# Altium PCB lab2_kapustin_buck.PcbDoc
Units mm, origin at the board's own origin, x right, y up, seen from the top; angles counter-clockwise.
Board outline 16 x 30 mm, 6 copper layers (Top Layer, Signal Layer 1, Signal Layer 2, Signal Layer 3, Signal Layer 4, Bottom Layer), stack 1.503 mm thick; 38 components, 21 nets, 105 pads, 94 vias.
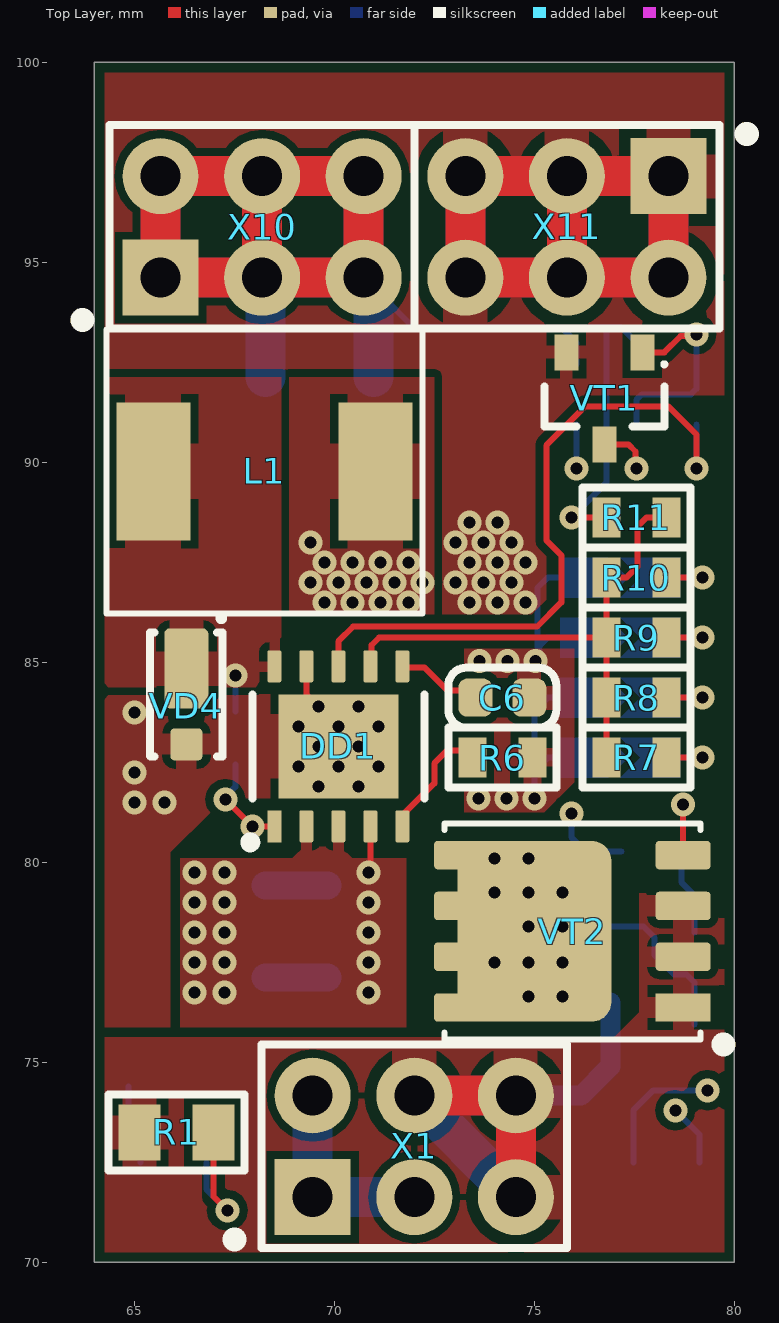
[diagram p0: Top Layer view]
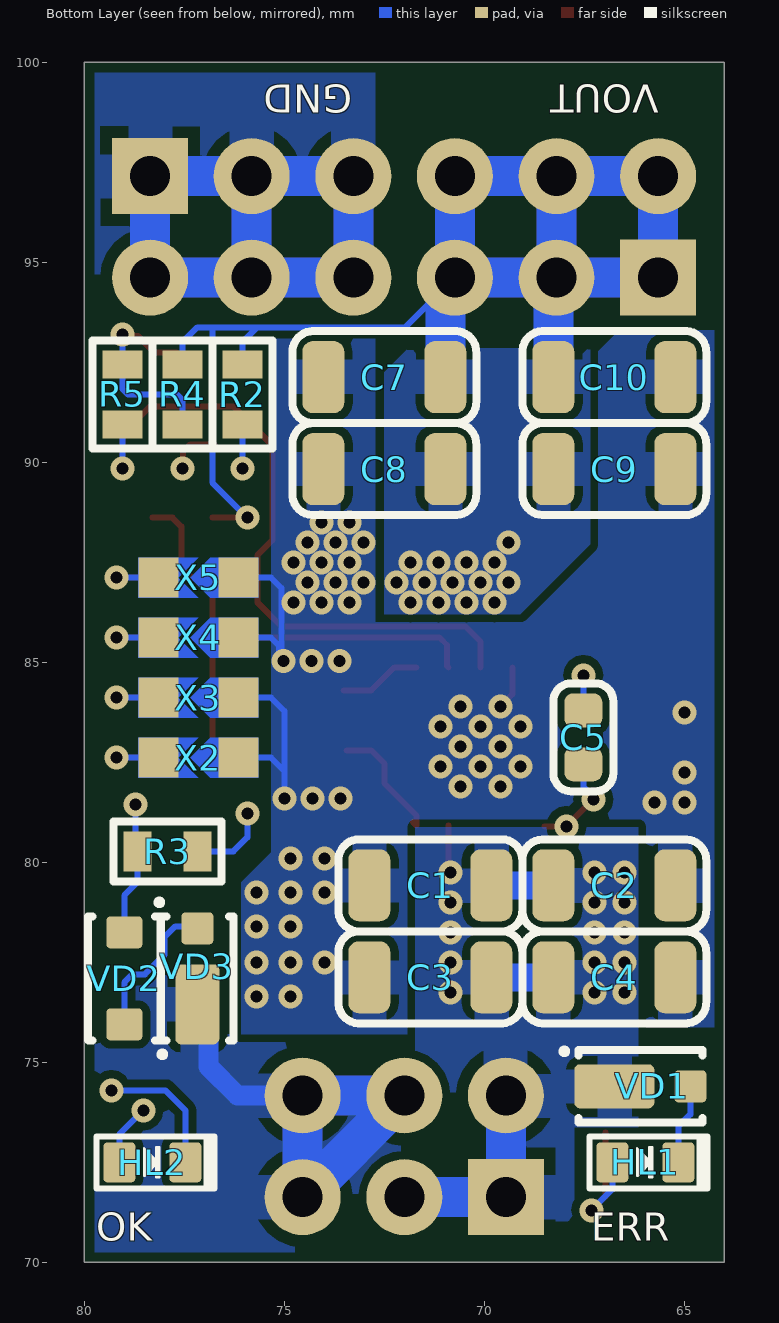
[diagram p1: Bottom Layer view, seen from below]
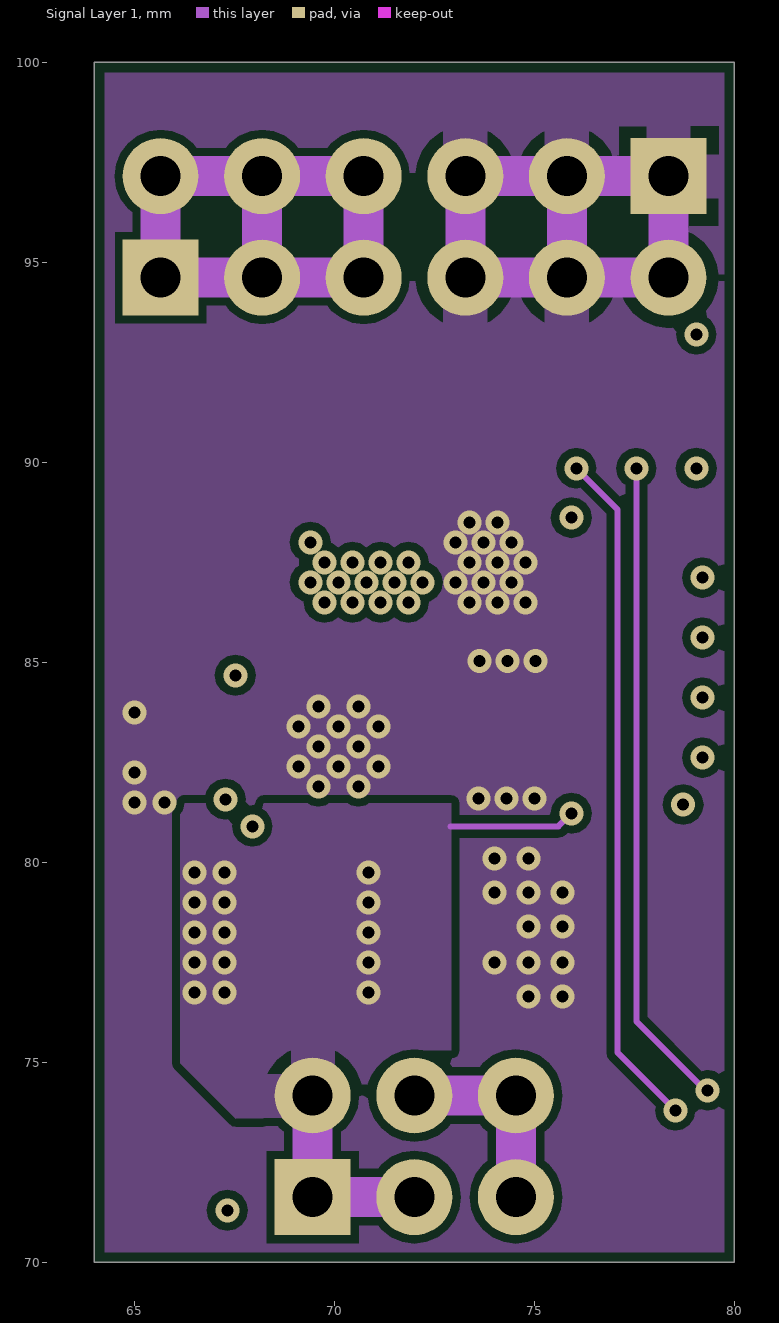
[diagram p2: Signal Layer 1]
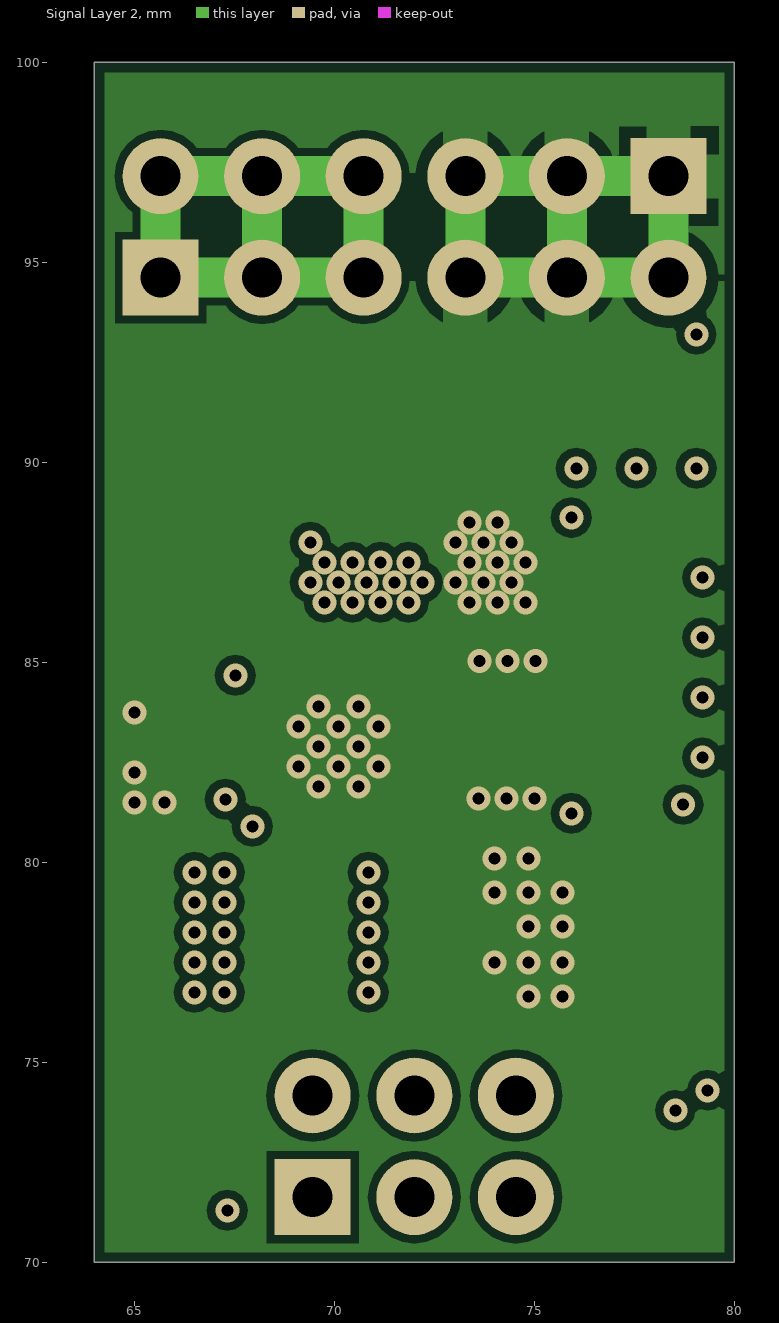
[diagram p3: Signal Layer 2]

## Layer stack, top to bottom
Top Solder: solder mask 0.0102, Solder Resist, Dk 3.5
Top Layer: signal copper 0.018
Prepreg 1: prepreg 0.125, FR4 HiTg170, Dk 5.07
Signal Layer 1: signal copper 0.018
Core 1: core 0.51, FR4, Dk 4.6
Signal Layer 2: signal copper 0.018
Prepreg 2: prepreg 0.125, FR4 HiTg170, Dk 5.07
Signal Layer 3: signal copper 0.018
Core 2: core 0.51, FR4, Dk 4.6
Signal Layer 4: signal copper 0.018
Prepreg 3: prepreg 0.125, FR4 HiTg170, Dk 5.07
Bottom Layer: signal copper 0.018
Bottom Solder: solder mask 0.0102, Solder Resist, Dk 3.5

## Board outline
64,70 64,100 80,100 80,72 80,70

## Design rules (kind name [scope] priority, off if disabled: settings)
AcuteAngle min_acute_angle [OnCopper] p1: minimum=3.50000000000000E+0001 checktracksonly=FALSE // Минимальный угол между примитивами топологии
BoardOutlineClearance board_outline_clearance_std [NOT (OnLayer('Bottom Overlay') OR OnLayer('Top Overlay'))] p1: gap=0.25 ignorepadtopadclearanceinfootprint=FALSE except(0: Arc-SplitContinuation Track-SplitContinuation SMDPad-SplitContinuation THPad-SplitContinuation Via-SplitContinuation Fill-SplitContinuation Poly-SplitContinuation Region-SplitContinuation Text-SplitContinuation) // Отступ элементов топологии от края фрезеруемой печатной платы
Clearance clearance_outer_18um_std [OnTopLayer OR OnBottomLayer] p1: gap=0.125 ignorepadtopadclearanceinfootprint=TRUE except(0.2: Arc-Fill Arc-Poly Track-Fill Track-Poly SMDPad-SMDPad SMDPad-Fill SMDPad-Poly THPad-Fill THPad-Poly Via-Fill Via-Poly Fill-Fill Fill-Poly Poly-Poly Poly-Region Poly-Text; 0.25: Arc-Hole Track-Hole SMDPad-Hole THPad-Hole Via-Hole Fill-Hole Poly-Hole Region-Hole Text-Hole) // Зазоры на внешних слоях
Clearance clearance_inner_18um_std [NOT (OnTopLayer Or OnBottomLayer)] p2: gap=0.125 ignorepadtopadclearanceinfootprint=FALSE except(0.2: Arc-Fill Arc-Poly Track-Fill Track-Poly SMDPad-SMDPad SMDPad-Fill SMDPad-Poly THPad-Fill THPad-Poly Via-Fill Via-Poly Fill-Fill Fill-Poly Poly-Poly Poly-Region Poly-Text; 0.25: Arc-Hole Track-Hole SMDPad-Hole THPad-Hole Via-Hole Fill-Hole Poly-Hole Region-Hole Text-Hole) // Зазоры на внутренних слоях
ComponentClearance [All] p1: gap=0 collisioncheckmode=3 verticalgap=0 showdistances=FALSE
DiffPairsRouting diff_pairs_routing [All] p1: maxlimit=0.254 minlimit=0.127 mostfreqgap=0.254 toplayer_maxgap=0.127 toplayer_prefgap=0.127 toplayer_minwidth=0.143 toplayer_maxwidth=0.143 toplayer_prefwidth=0.143 midlayer1_minwidth=0.381 midlayer1_maxwidth=0.381 midlayer1_prefwidth=0.381 midlayer2_minwidth=0.381 midlayer2_maxwidth=0.381 midlayer2_prefwidth=0.381 midlayer3_minwidth=0.381 midlayer3_maxwidth=0.381 midlayer3_prefwidth=0.381 midlayer4_minwidth=0.381 midlayer4_maxwidth=0.381 midlayer4_prefwidth=0.381 bottomlayer_maxgap=0.127 bottomlayer_prefgap=0.127 bottomlayer_minwidth=0.143 bottomlayer_maxwidth=0.143 bottomlayer_prefwidth=0.143 impedanceprofiledriven=TRUE impedanceprofileid={FD46899E-B5A2-4EF5-A302-5D2DB6A51F35} maxuncoupledlength=12.7 // Правила трассировки дифференциальных пар
HoleSize min_hole_size_std [IsPad] p1: absolutevalues=TRUE maxlimit=5.9 minlimit=0.6 maxpercent=80.000 minpercent=20.000 // Диаметр межслойного переходного отверстия
HoleSize min_hole_size_via_std [IsVia] p2: absolutevalues=TRUE maxlimit=5.9 minlimit=0.3 maxpercent=80.000 minpercent=20.000 // Минимальный диаметр монтажного отверстия
HoleToHoleClearance hole_to_hole_clearance_std [All] p1: gap=0.2 allowstackedmicrovias=FALSE // Минимальное расстояние между краями двух отверстий
MinimumAnnularRing min_via_ar_std [All] p1: minimumring=0.15 // Поясок площадки переходного отверстия (Annular ring VIA)
MinimumAnnularRing min_pad_ar_std [All] p2: minimumring=0.2 // Поясок монтажной контактной площадки (Annular ring PAD)
MinimumSolderMaskSliver min_solder_mask_bridge_std [All] p1: minsoldermaskwidth=0.15 // Мнимальная ширина масочного мостика
PlaneClearance plane_clearance_18um_std [All] p1: clearance=0.2 // Отступ полигона (для слоя plane) от элементов топологии
PlaneConnect [All] p1: planeconnectstyle=Relief reliefexpansion=0.5 reliefentries=4 reliefconductorwidth=0.2 reliefairgap=0.2
PolygonConnect poly_connect_to_pad<=0.3 [(AsMM(PadXSize_AllLayers)<=0.301) or (AsMM(PadYSize_AllLayers)<=0.301)] p1: thpad.connectstyle=Relief thpad.reliefconductorwidth=0.2 thpad.reliefentries=4 thpad.polygonreliefangle="90 Angle" thpad.airgapwidth=0.2 smdpad.connectstyle=Relief smdpad.reliefconductorwidth=0.2 smdpad.reliefentries=4 smdpad.polygonreliefangle="90 Angle" smdpad.airgapwidth=0.2 via.connectstyle=Direct via.reliefconductorwidth=0.254 via.reliefentries=4 via.polygonreliefangle="90 Angle" via.airgapwidth=0.254 // Правила подключения полигонов для падов от 0,3мм и меньше
PolygonConnect poly_connect_to_pad<=0.4 [(AsMM(PadXSize_AllLayers)<=0.401) or (AsMM(PadYSize_AllLayers)<=0.401)] p2: thpad.connectstyle=Relief thpad.reliefconductorwidth=0.26 thpad.reliefentries=4 thpad.polygonreliefangle="90 Angle" thpad.airgapwidth=0.2 smdpad.connectstyle=Relief smdpad.reliefconductorwidth=0.26 smdpad.reliefentries=4 smdpad.polygonreliefangle="90 Angle" smdpad.airgapwidth=0.2 via.connectstyle=Direct via.reliefconductorwidth=0.254 via.reliefentries=4 via.polygonreliefangle="90 Angle" via.airgapwidth=0.254 // Правила подключения полигонов для падов от 0,4 и меньше
PolygonConnect poly_connect_to_pad<=0.6 [(AsMM(PadXSize_AllLayers)<=0.601) or (AsMM(PadYSize_AllLayers)<=0.601)] p3: thpad.connectstyle=Relief thpad.reliefconductorwidth=0.33 thpad.reliefentries=4 thpad.polygonreliefangle="90 Angle" thpad.airgapwidth=0.2 smdpad.connectstyle=Relief smdpad.reliefconductorwidth=0.33 smdpad.reliefentries=4 smdpad.polygonreliefangle="90 Angle" smdpad.airgapwidth=0.2 via.connectstyle=Direct via.reliefconductorwidth=0.254 via.reliefentries=4 via.polygonreliefangle="90 Angle" via.airgapwidth=0.254 // Правила подключения полигонов для падов от 0,6мм и меньше
PolygonConnect poly_connect_to_pad<=0.7 [(AsMM(PadXSize_AllLayers)<=0.701) or (AsMM(PadYSize_AllLayers)<=0.701)] p4: thpad.connectstyle=Relief thpad.reliefconductorwidth=0.46 thpad.reliefentries=4 thpad.polygonreliefangle="90 Angle" thpad.airgapwidth=0.2 smdpad.connectstyle=Relief smdpad.reliefconductorwidth=0.46 smdpad.reliefentries=4 smdpad.polygonreliefangle="90 Angle" smdpad.airgapwidth=0.2 via.connectstyle=Direct via.reliefconductorwidth=0.254 via.reliefentries=4 via.polygonreliefangle="90 Angle" via.airgapwidth=0.254 // Правила подключения полигонов для падов от 0,7мм и меньше
PolygonConnect poly_connect_to_pad<=0.8 [(AsMM(PadXSize_AllLayers)<=0.8)or(AsMM(PadYSize_AllLayers)<=0.8)] p5: thpad.connectstyle=Relief thpad.reliefconductorwidth=0.53 thpad.reliefentries=4 thpad.polygonreliefangle="90 Angle" thpad.airgapwidth=0.3 smdpad.connectstyle=Relief smdpad.reliefconductorwidth=0.53 smdpad.reliefentries=4 smdpad.polygonreliefangle="90 Angle" smdpad.airgapwidth=0.2 via.connectstyle=Direct via.reliefconductorwidth=0.254 via.reliefentries=4 via.polygonreliefangle="90 Angle" via.airgapwidth=0.254 // Правила подключения полигонов для падов от 0,8мм и меньше
PolygonConnect poly_connect_to_pad<=1 [(AsMM(PadXSize_AllLayers)<=1.01)or(AsMM(PadYSize_AllLayers)<=1.01)] p6: thpad.connectstyle=Relief thpad.reliefconductorwidth=0.6 thpad.reliefentries=4 thpad.polygonreliefangle="90 Angle" thpad.airgapwidth=0.3 smdpad.connectstyle=Relief smdpad.reliefconductorwidth=0.6 smdpad.reliefentries=4 smdpad.polygonreliefangle="90 Angle" smdpad.airgapwidth=0.2 via.connectstyle=Direct via.reliefconductorwidth=0.254 via.reliefentries=4 via.polygonreliefangle="90 Angle" via.airgapwidth=0.254 // Правила подключения полигонов для падов от 1мм и меньше
PolygonConnect poly_connect_to_pad<=1.3 [(AsMM(PadXSize_AllLayers)<=1.31)or(AsMM(PadYSize_AllLayers)<=1.31)] p7: thpad.connectstyle=Relief thpad.reliefconductorwidth=0.66 thpad.reliefentries=4 thpad.polygonreliefangle="90 Angle" thpad.airgapwidth=0.3 smdpad.connectstyle=Relief smdpad.reliefconductorwidth=0.86 smdpad.reliefentries=4 smdpad.polygonreliefangle="90 Angle" smdpad.airgapwidth=0.2 via.connectstyle=Direct via.reliefconductorwidth=0.254 via.reliefentries=4 via.polygonreliefangle="90 Angle" via.airgapwidth=0.254 // Правила подключения полигонов для падов от 1,3мм и меньше
PolygonConnect poly_connect_to_pad<=1.6 [(AsMM(PadXSize_AllLayers)<=1.61)or(AsMM(PadYSize_AllLayers)<=1.61)] p8: thpad.connectstyle=Relief thpad.reliefconductorwidth=0.8 thpad.reliefentries=4 thpad.polygonreliefangle="90 Angle" thpad.airgapwidth=0.3 smdpad.connectstyle=Relief smdpad.reliefconductorwidth=1 smdpad.reliefentries=4 smdpad.polygonreliefangle="90 Angle" smdpad.airgapwidth=0.2 via.connectstyle=Direct via.reliefconductorwidth=0.254 via.reliefentries=4 via.polygonreliefangle="90 Angle" via.airgapwidth=0.254 // Правила подключения полигонов для падов от 1,6мм и меньше
PolygonConnect poly_connect_to_pad<=1.8 [(AsMM(PadXSize_AllLayers)<=1.8)or(AsMM(PadYSize_AllLayers)<=1.8)] p9: thpad.connectstyle=Relief thpad.reliefconductorwidth=1 thpad.reliefentries=4 thpad.polygonreliefangle="90 Angle" thpad.airgapwidth=0.3 smdpad.connectstyle=Relief smdpad.reliefconductorwidth=1.2 smdpad.reliefentries=4 smdpad.polygonreliefangle="90 Angle" smdpad.airgapwidth=0.2 via.connectstyle=Direct via.reliefconductorwidth=0.254 via.reliefentries=4 via.polygonreliefangle="90 Angle" via.airgapwidth=0.254 // Правила подключения полигонов для падов от 1,8мм и меньше
PolygonConnect poly_connect_to_pad<=2 [(AsMM(PadXSize_AllLayers)<=2.01)or(AsMM(PadYSize_AllLayers)<=2.01)] p10: thpad.connectstyle=Relief thpad.reliefconductorwidth=1.1 thpad.reliefentries=4 thpad.polygonreliefangle="90 Angle" thpad.airgapwidth=0.3 smdpad.connectstyle=Relief smdpad.reliefconductorwidth=1.4 smdpad.reliefentries=4 smdpad.polygonreliefangle="90 Angle" smdpad.airgapwidth=0.2 via.connectstyle=Direct via.reliefconductorwidth=0.254 via.reliefentries=4 via.polygonreliefangle="90 Angle" via.airgapwidth=0.254 // Правила подключения полигонов для падов от 2мм и меньше
PolygonConnect poly_connect_to_pad<=2.3 [(AsMM(PadXSize_AllLayers)<=2.31)or(AsMM(PadYSize_AllLayers)<=2.31)] p11: thpad.connectstyle=Relief thpad.reliefconductorwidth=1.2 thpad.reliefentries=4 thpad.polygonreliefangle="90 Angle" thpad.airgapwidth=0.3 smdpad.connectstyle=Relief smdpad.reliefconductorwidth=1.4 smdpad.reliefentries=4 smdpad.polygonreliefangle="90 Angle" smdpad.airgapwidth=0.2 via.connectstyle=Direct via.reliefconductorwidth=0.254 via.reliefentries=4 via.polygonreliefangle="90 Angle" via.airgapwidth=0.254 // Правила подключения полигонов для падов от 2,3мм и меньше
PolygonConnect poly_connect_to_pad<=2.5 [(AsMM(PadXSize_AllLayers)<=2.51)or(AsMM(PadYSize_AllLayers)<=2.51)] p12: thpad.connectstyle=Relief thpad.reliefconductorwidth=1.2 thpad.reliefentries=4 thpad.polygonreliefangle="90 Angle" thpad.airgapwidth=0.3 smdpad.connectstyle=Relief smdpad.reliefconductorwidth=1.4 smdpad.reliefentries=4 smdpad.polygonreliefangle="90 Angle" smdpad.airgapwidth=0.2 via.connectstyle=Direct via.reliefconductorwidth=0.254 via.reliefentries=4 via.polygonreliefangle="90 Angle" via.airgapwidth=0.254 // Правила подключения полигонов для падов от 2,5мм и меньше
PolygonConnect poly_connect_to_pad<=2.7 [(AsMM(PadXSize_AllLayers)<=2.71)or(AsMM(PadYSize_AllLayers)<=2.71)] p13: thpad.connectstyle=Relief thpad.reliefconductorwidth=1.4 thpad.reliefentries=4 thpad.polygonreliefangle="90 Angle" thpad.airgapwidth=0.3 smdpad.connectstyle=Relief smdpad.reliefconductorwidth=1.6 smdpad.reliefentries=4 smdpad.polygonreliefangle="90 Angle" smdpad.airgapwidth=0.2 via.connectstyle=Direct via.reliefconductorwidth=0.254 via.reliefentries=4 via.polygonreliefangle="90 Angle" via.airgapwidth=0.254 // Правила подключения полигонов для падов от 2,7мм и меньше
PolygonConnect poly_connect_to_pad<=3 [(AsMM(PadXSize_AllLayers)<=3.01)or(AsMM(PadYSize_AllLayers)<=3.01)] p14: thpad.connectstyle=Relief thpad.reliefconductorwidth=1.6 thpad.reliefentries=4 thpad.polygonreliefangle="90 Angle" thpad.airgapwidth=0.3 smdpad.connectstyle=Relief smdpad.reliefconductorwidth=1.8 smdpad.reliefentries=4 smdpad.polygonreliefangle="90 Angle" smdpad.airgapwidth=0.2 via.connectstyle=Direct via.reliefconductorwidth=0.254 via.reliefentries=4 via.polygonreliefangle="90 Angle" via.airgapwidth=0.254 // Правила подключения полигонов для падов от 3мм и меньше
PolygonConnect poly_connect_to_pad<=7 [(AsMM(PadXSize_AllLayers)<7.01)or(AsMM(PadYSize_AllLayers)<=7.01)] p15: thpad.connectstyle=Relief thpad.reliefconductorwidth=2 thpad.reliefentries=4 thpad.polygonreliefangle="90 Angle" thpad.airgapwidth=0.4 smdpad.connectstyle=Relief smdpad.reliefconductorwidth=2 smdpad.reliefentries=4 smdpad.polygonreliefangle="90 Angle" smdpad.airgapwidth=0.3 via.connectstyle=Direct via.reliefconductorwidth=0.254 via.reliefentries=4 via.polygonreliefangle="90 Angle" via.airgapwidth=0.254 // Правила подключения полигонов для падов от 7мм и меньше
PolygonConnect poly_connect_to_pad [All] p16: thpad.connectstyle=Relief thpad.reliefconductorwidth=0.25 thpad.reliefentries=4 thpad.polygonreliefangle="90 Angle" thpad.airgapwidth=0.2 smdpad.connectstyle=Relief smdpad.reliefconductorwidth=0.25 smdpad.reliefentries=4 smdpad.polygonreliefangle="90 Angle" smdpad.airgapwidth=0.2 via.connectstyle=Direct via.reliefconductorwidth=0.25 via.reliefentries=4 via.polygonreliefangle="90 Angle" via.airgapwidth=0.2 // Правила подключения полигонов общие
RoutingCorners [All] p1 off: cornerstyle=45-Degree minsetback=2.5 maxsetback=2.5
RoutingVias [All] p1: holewidth=0.3 width=0.6 viastyle="Through Hole" minholewidth=0.3 minwidth=0.6 maxholewidth=5.9 maxwidth=6.4
SilkToSilkClearance silk_to_silk_clearance_std [All] p1 off: silktosilkclearance=0.15 // Отступ текста шелкографии от других примитивов шелкографии
SilkToSolderMaskClearance silk_to_solder_mask_clearance_std [IsPad] p1 off: minsilkscreentomaskgap=0.15 clearancetoexposedcopper=FALSE // Минимальное расстояние между элементами шелкографии и вскрытой медью
SolderMaskExpansion solder_mask_expansion_std [All] p1: expansion=0.05 // Припуск паяльной масски
UnRoutedNet [All] p1: checkbadconnections=TRUE
Width width_18um_std [All] p1: maxlimit=10 minlimit=0.125 preferedwidth=0.15 checkconnectedcopper=TRUE // Ширина проводников (общая)
19 further rules are at their usual default settings.

## Classes and differential pairs
component class POWER: C3 C4 C5 C6 DD1 HL2 L1 R2 R4 R5 R6 R8 R11 VD1 VD3 VD4 VT1

## Components (designator, comment, footprint, x,y, rotation, side; value= is the part's Value field where it differs from the comment)
C1 "10 мк" C1206 71.35,79.425 r180 bottom
C2 "10 мк" C1206 66.75,79.425 r0 bottom
C3 "10 мк" C1206 71.35,77.125 r180 bottom
C4 "10 мк" C1206 66.75,77.125 r0 bottom
C5 "0,1 мк" C0603 67.525,83.125 r90 bottom
C6 "0,022 мк" C0603 74.2,84.117 r180 top
C7 "10 мк" C1206 72.5,92.13 r180 bottom
C8 "10 мк" C1206 72.5,89.83 r180 bottom
C9 "10 мк" C1206 66.75,89.83 r0 bottom
C10 "10 мк" C1206 66.75,92.13 r0 bottom
DD1 "LMR14050QDPRRQ1" WSON-10 70.1,82.9 r90 top
HL1 "KP-1608EC" D0603 65.975,72.5 r180 bottom
HL2 "KP-1608SGC" D0603 78.3,72.5 r180 bottom
L1 "10 мкГн" IHLP2525CZ 68.25,89.775 r0 top
R1 "2,2 к" R0805 66.05,73.25 r0 top
R2 "2,2 к" R0603 76.05,91.7 r90 bottom
R3 "1,2 к" R0603 77.925,80.275 r180 bottom
R4 "47 к" R0603 77.55,91.7 r90 bottom
R5 "100" R0603 79.05,91.7 r90 bottom
R6 "22 к" R0603 74.2,82.617 r0 top
R7 "30 к" R0603 77.55,82.617 r0 top
R8 "18 к" R0603 77.55,84.117 r180 top
R9 "6,8 к" R0603 77.55,85.617 r0 top
R10 "3,3 к" R0603 77.55,87.117 r0 top
R11 "100 к" R0603 77.55,88.617 r180 top
VD1 "MSS2P3" DO-219AD 65.9,74.4 r0 bottom
VD2 "PLZ15C" DO-219AC 79,77.1 r90 bottom
VD3 "MSS2P3" DO-219AD 77.175,77.3 r270 bottom
VD4 "MSS2P3" DO-219AD 66.3,84 r90 top
VT1 "IRLML2502TRPBF" SOT23-3 76.75,91.6 r270 top
VT2 "CSD19532Q5B" SON-8P 75.95,78.275 r180 top
X1 "DS1021-2*3SF11" PLS-2,54-2X3-THT-V 72,72.9 r0 top
X2 "Перемычка запаиваемая 3x1" JUMPER_SOLDERED_3X1 76.15,82.617 r0 bottom
X3 "Перемычка запаиваемая 3x1" JUMPER_SOLDERED_3X1 76.15,84.117 r0 bottom
X4 "Перемычка запаиваемая 3x1" JUMPER_SOLDERED_3X1 76.15,85.617 r0 bottom
X5 "Перемычка запаиваемая 3x1" JUMPER_SOLDERED_3X1 76.15,87.117 r0 bottom
X10 "DS1021-2*3SF11" PLS-2,54-2X3-THT-V 68.195,95.885 r0 top
X11 "DS1021-2*3SF11" PLS-2,54-2X3-THT-V 75.815,95.885 r180 top

## Footprints (in the part's own frame and the unit in brackets; to place one, negate y for a bottom-side part, rotate by r counter-clockwise, add the part's x,y. Pads: shape width x height; smd on the part's side, far side on the other; paste and mask are expansions set on the pad)
C0603 [mm] "Chip Capacitor, 2-Leads, Body 1,60x0,80mm, IPC Medium Density"
  rrect50% 0.85x0.95 smd: 1(-0.675,0) 2(0.675,0)
  Top Layer pour cut-out: -0.254,0.5 -0.254,-0.5 0.254,-0.5 0.254,0.5
  silkscreen extent -1.35,-0.75 1.35,0.75, body extent -0.85,-0.45 0.85,0.45, height 0.9
C1206 [mm] "Chip Capacitor, 2-Leads, Body 3,20x1,60mm, IPC Medium Density"
  rrect50% 1.05x1.8 smd: 1(-1.525,0) 2(1.525,0)
  silkscreen extent -2.3,-1.15 2.3,1.15, body extent -1.6,-0.8 1.6,0.8, height 1.25
D0603 [mm]
  rrect25% 0.8x1 smd paste-10 mask+0.1: 1(-0.825,0) 2(0.825,0)
  silkscreen extent -1.4,-0.65 1.55,0.65, body extent -0.81,-0.4 0.81,0.4, height 0.6
DO-219AC [mm] "MicroSMP (DO-219AD), Body 2,50x1,30mm, IPC Medium Density"
  rrect25% 0.8x0.9 smd: 1(-1.15,0) 2(1.15,0)
  silkscreen extent -1.55,-0.94 1.97,0.91, body extent -1.22,-0.65 1.28,0.65, height 0.71
DO-219AD [mm] "MicroSMP (DO-219AD), Body 2,50x1,30mm, IPC Medium Density"
  rrect25% 0.8x0.8 smd: 1(-1.05,0)
  rrect25% 2x1.1 smd: 2(0.85,0)
  silkscreen extent -1.35,-0.94 2.17,0.91, body extent -1.22,-0.65 1.28,0.65, height 0.71
IHLP2525CZ [mm] "IHLP2525CZ, 2-Leads, Body 6,47x6,47mm"
  rect 1.85x3.45 smd: 1(-2.775,0) 2(2.775,0)
  silkscreen extent -3.95,-3.55 3.95,3.55, body extent -3.43,-3.31 3.43,3.16, height 3
JUMPER_SOLDERED_3X1 [mm]
  rect 1x1 smd mask+0: 1(0,0) 2(2,0)
  Top Layer region: -0.5,0.5 0.7,0.5 1.2,0 0.7,-0.5 -0.5,-0.5
  Top Layer region: 1.75,1
  Top Layer region: 2.5,0.5 1,0.5 1.5,0 1,-0.5 2.5,-0.5
PLS-2,54-2X3-THT-V [mm] "PLS-2x3"
  rect 1.9x1.9 hole 1: 1(-2.54,-1.27)
  round 1.9 hole 1: 2(-2.54,1.27) 3(0,-1.27)
  round 1.9 hole 1 mask+0.102: 4(0,1.27) 5(2.54,-1.27) 6(2.54,1.27)
  silkscreen extent -4.5,-2.55 3.81,2.54, body extent -3.81,-2.54 3.81,2.54, height 8.59
R0603 [mm]
  rect 0.7x1 smd: 1(-0.75,0) 2(0.75,0)
  silkscreen extent -1.35,-0.75 1.35,0.75, body extent -0.8,-0.43 0.8,0.43, height 0.45
R0805 [mm]
  rect 1.05x1.4 smd: 1(-0.925,0) 2(0.925,0)
  silkscreen extent -1.7,-0.95 1.7,0.95, body extent -1.1,-0.7 1.1,0.7, height 0.45
SON-8P [mm]
  rrect25% 3.85x4.52 smd paste-10: D(0.95,0)
  rrect25% 1.372x0.71 smd paste-10: D(2.77,1.905) D(2.77,-0.635) D(2.77,0.635) D(2.77,-1.905)
  rrect25% 1.372x0.71 smd paste-0.002: G(-2.77,-1.905) S(-2.77,-0.635) S(-2.77,0.635)
  rect 1.372x0.71 smd paste-0.002: S(-2.77,1.905)
  silkscreen extent -3.78,-2.7 3.2,2.83, body extent -3.08,-2.58 3.07,2.57, height 1.1
SOT23-3 [mm]
  rect 0.9x0.6 smd: 1(-1.15,0.95) 2(-1.15,-0.95) 3(1.15,0)
  silkscreen extent -0.9,-1.5 0.7,1.55, body extent -1.35,-1.5 1.15,1.5, height 1.05
WSON-10 [mm] "TSOP, 20-Leads, Body 6,50x4,40mm, Pitch 0,65mm, Thermal Pad 3,86x2,74mm, IPC Medium Density"
  rect 2.6x3 smd: 0(0,0)
  rect 0.8x0.35 smd paste-0.02 mask+0.08: 1(-2,1.6)
  rrect25% 0.8x0.35 smd paste-0.02 mask+0.08: 2(-2,0.8) 3(-2,0) 4(-2,-0.8) 5(-2,-1.6) 6(2,-1.6) 7(2,-0.8) 8(2,0) 9(2,0.8) 10(2,1.6)
  silkscreen extent -2.52,-2.15 1.3,2.32, body extent -2,-2 2,2, height 0.8

## Part data
C1 C2 C7 C8 C9 C10: library part с0042, "Конденсатор", HelpURL=http://weblib.samsungsem.com/mlcc/mlcc-ec-data-sheet.do?partNumber=CL31B106KBHNNN, ID=с0042, Корпус=1206, Наименование=CL31B106KBHNNN, Напряжение="50 В", Номинал="10 мк", Описание="Конденсатор керамический 1206 10 мкФ 50 В ±10 % X7R", Отклонение="±10 %", Примечание="В наименовании убрана последняя буква, обозначающая упаковку", Производитель=Samsung, ТКЕ=X7R, Фамилия=Капустин
C3 C4: library part c0004, "Конденсатор", ClassName=POWER, HelpURL=http://www.samsungsem.com/kr/support/product-search/mlcc/__icsFiles/afieldfile/2019/05/10/19-CL31A106KBHNNNE.pdf, ID=c0004, Корпус=1206, Наименование=CL31A106KBHNNNE, Напряжение="50 В", Номинал="10 мк", Описание="Конденсатор керамический 1206 10 мкФ 50 В ±10 % X5R", Отклонение="±10 %", Производитель=Samsung, ТКЕ=X5R, Фамилия=Капустин
C5: library part c0007, "Конденсатор", ClassName=POWER, HelpURL=http://www.samsungsem.com/kr/support/product-search/mlcc/__icsFiles/afieldfile/2019/06/18/CL10B104KB8NNNC-19.pdf, ID=c0007, Корпус=0603, Наименование=CL10B104KB8NNN, Напряжение="50 В", Номинал="0,1 мк", Описание="Конденсатор керамический 0603 0,1 мкФ 50 В ±10 % X7R", Отклонение="±10 %", Примечание="В наименовании убрана последняя буква, обозначающая упаковку", Производитель=Samsung, ТКЕ=X7R, Фамилия=Черемный
C6: library part c0030, "Конденсатор", ClassName=POWER, HelpURL=http://www.samsungsem.com/kr/support/product-search/mlcc/__icsFiles/afieldfile/2019/06/18/CL10B223KB8NNND-19.pdf, ID=c0030, Корпус=0603, Наименование=CL10B223KB8NNN, Напряжение="50 В", Номинал="0,022 мк", Описание="Конденсатор керамический 0603 0,022 мкФ 50 В ±10 % X7R", Отклонение="±10 %", Примечание="В наименовании убрана последняя буква, обозначающая упаковку", Производитель=Samsung, ТКЕ=X7R, Фамилия=Капустин
DD1: library part dcdc0002, ClassName=POWER, HelpURL=http://www.ti.com/lit/ds/symlink/lmr14050-q1.pdf, ID=dcdc0002, Входное напряжение макс#="40 В", Входное напряжение мин#="4 В", Выходное напряжение, макс#="28 В", Выходное напряжение, мин#="0,8 В", Выходной ток="5 А", Корпус=WSON-10, Наименование=LMR14050QDPRRQ1, Напряжение питания ном#="24 В", Описание="Понижающий импульсный стабилизатор", Производитель="Texas Instruments", Температура окружающей среды (корпуса), макс#="+125 °C", Температура окружающей среды (корпуса), мин#="-40 °C", Фамилия=Капустин, Частота коммутации="0,2 … 2,5 МГц"
HL1: library part led0002, HelpURL=http://www.farnell.com/datasheets/2045829.pdf?_ga=2.151514041.1066726363.1573580702-223521920.1573064505, ID=led0002, Корпус=D0603, Максимальное обратное напряжение="5 В", Максимальное прямое напряжение="2,5 В", Максимальный импульсный прямой ток="160 мА", Максимальный обратный ток="10 мкА", Наименование=KP-1608EC, Описание="Светодиод красный SMD 0603", Примечание="Не найти документацию на свйте производителя", Производитель=Kingbright, Прямой ток="20 мА", Температура окружающей среды (корпуса), макс#="+85 °C", Температура окружающей среды (корпуса), мин#="-40 °C", Фамилия=Капустин, Цвет=Красный
HL2: library part led0004, ClassName=POWER, HelpURL=http://www.farnell.com/datasheets/2045827.pdf?_ga=2.72147859.1066726363.1573580702-223521920.1573064505, ID=led0004, Корпус=D0603, Максимальное обратное напряжение="5 В", Максимальное прямое напряжение="2,5 В", Максимальный импульсный прямой ток="140 мА", Максимальный обратный ток="11 мкА", Наименование=KP-1608SGC, Описание="Светодиод зеленый SMD 0603", Примечание="Не найти документацию на свйте производителя", Производитель=Kingbright, Прямой ток="20 мА", Температура окружающей среды (корпуса), макс#="+85 °C", Температура окружающей среды (корпуса), мин#="-40 °C", Фамилия=Капустин, Цвет=Зеленый
L1: library part ind0005, ClassName=POWER, HelpURL=https://www.vishay.com/docs/34104/ihlp-2525cz-01.pdf, ID=ind0005, Добротность=40, Корпус=6,47*6,47*3,0, Максимальный ток="4,1 А", Наименование=IHLP2525CZER100M01, Номинал="10 мкГн", Описание="Катушка индуктивности экранированная / 10 мкГн 3 А", Отклонение=±20%, Производитель=Vishay, Сопротивление обмотки="102 мОм", Температура окружающей среды (корпуса), макс#="+125 °C", Температура окружающей среды (корпуса), мин#="-55 °C", Ток насыщения="7 А", Фамилия=Капустин
R1: library part r0378, "Резистор 0,125Вт", HelpURL=https://www.yageo.com/upload/media/product/products/datasheet/rchip/PYu-RC_Group_51_RoHS_L_10.pdf, ID=r0378, Корпус=0805, Наименование=RC0805FR-072K2L, Напряжение="150 В", Номинал="2,2 к", Описание="Резистор чип 0805 2,2 кОм 0,125 Вт ±1 %", Отклонение="±1 %", Производитель=YAGEO, Температура окружающей среды (корпуса), макс#="+155 °C", Температура окружающей среды (корпуса), мин#="-55 °C", Температурный коэффициент сопротивления="200 ppm", Фамилия=Капустин
R2: library part r0253, "Резистор 0,063Вт", ClassName=POWER, HelpURL=https://www.yageo.com/upload/media/product/products/datasheet/rchip/PYu-RC_Group_51_RoHS_L_10.pdf, ID=r0253, Корпус=0603, Наименование=RC0603FR-072K2L, Напряжение="75 В", Номинал="2,2 к", Описание="Резистор чип 0603 2,2 кОм 0,1 Вт ±1 %", Отклонение="±1 %", Производитель=YAGEO, Температура окружающей среды (корпуса), макс#="+155 °C", Температура окружающей среды (корпуса), мин#="-55 °C", Температурный коэффициент сопротивления="200 ppm", Фамилия=Капустин
R3: library part r0247, "Резистор 0,063Вт", HelpURL=https://www.yageo.com/upload/media/product/products/datasheet/rchip/PYu-RC_Group_51_RoHS_L_10.pdf, ID=r0247, Корпус=0603, Наименование=RC0603FR-071K2L, Напряжение="75 В", Номинал="1,2 к", Описание="Резистор чип 0603 1,2 кОм 0,1 Вт ±1 %", Отклонение="±1 %", Производитель=YAGEO, Температура окружающей среды (корпуса), макс#="+155 °C", Температура окружающей среды (корпуса), мин#="-55 °C", Температурный коэффициент сопротивления="200 ppm", Фамилия=Капустин
R4: library part r0007, "Резистор 0,063Вт", ClassName=POWER, HelpURL=https://www.yageo.com/upload/media/product/products/datasheet/rchip/PYu-RC_Group_51_RoHS_L_10.pdf, ID=r0007, Корпус=0603, Наименование=RC0603FR-0747KL, Напряжение="75 В", Номинал="47 к", Описание="Резистор чип 0603 47 кОм 0,1 Вт ±1 %", Отклонение="±1 %", Производитель=YAGEO, Температура окружающей среды (корпуса), макс#="+155 °C", Температура окружающей среды (корпуса), мин#="-55 °C", Температурный коэффициент сопротивления="200 ppm", Фамилия=Капустин
R5: library part r0005, "Резистор 0,063Вт", ClassName=POWER, HelpURL=https://www.yageo.com/upload/media/product/products/datasheet/rchip/PYu-RC_Group_51_RoHS_L_10.pdf, ID=r0005, Корпус=0603, Наименование=RC0603FR-07100RL, Напряжение="75 В", Номинал=100, Описание="Резистор чип 0603 100 Ом 0,1 Вт ±1 %", Отклонение="±1 %", Производитель=YAGEO, Температура окружающей среды (корпуса), макс#="+155 °C", Температура окружающей среды (корпуса), мин#="-55 °C", Температурный коэффициент сопротивления="200 ppm", Фамилия=Капустин
R6: library part r0272, "Резистор 0,063Вт", ClassName=POWER, HelpURL=https://www.yageo.com/upload/media/product/products/datasheet/rchip/PYu-RC_Group_51_RoHS_L_10.pdf, ID=r0272, Корпус=0603, Наименование=RC0603FR-0722KL, Напряжение="75 В", Номинал="22 к", Описание="Резистор чип 0603 22 кОм 0,1 Вт ±1 %", Отклонение="±1 %", Производитель=YAGEO, Температура окружающей среды (корпуса), макс#="+155 °C", Температура окружающей среды (корпуса), мин#="-55 °C", Температурный коэффициент сопротивления="200 ppm", Фамилия=Капустин
R7: library part r0020, "Резистор 0,063Вт", HelpURL=https://www.yageo.com/upload/media/product/products/datasheet/rchip/PYu-RC_Group_51_RoHS_L_10.pdf, ID=r0020, Корпус=0603, Наименование=RC0603FR-0730KL, Напряжение="75 В", Номинал="30 к", Описание="Резистор чип 0603 30 кОм 0,1 Вт ±1 %", Отклонение="±1 %", Производитель=YAGEO, Температура окружающей среды (корпуса), макс#="+155 °C", Температура окружающей среды (корпуса), мин#="-55 °C", Температурный коэффициент сопротивления="100 ppm", Фамилия=Капустин
R8: library part r0002, "Резистор 0,063Вт", ClassName=POWER, HelpURL=https://www.yageo.com/upload/media/product/products/datasheet/rchip/PYu-RC_Group_51_RoHS_L_10.pdf, ID=r0002, Корпус=0603, Наименование=RC0603FR-0718KL, Напряжение="75 В", Номинал="18 к", Описание="Резистор чип 0603 18 кОм 0,1 Вт ±1 %", Отклонение="±1 %", Производитель=YAGEO, Температура окружающей среды (корпуса), макс#="+155 °C", Температура окружающей среды (корпуса), мин#="-55 °C", Температурный коэффициент сопротивления="200 ppm", Фамилия=Капустин
R9: library part r0264, "Резистор 0,063Вт", HelpURL=https://www.yageo.com/upload/media/product/products/datasheet/rchip/PYu-RC_Group_51_RoHS_L_10.pdf, ID=r0264, Корпус=0603, Наименование=RC0603FR-076K8L, Напряжение="75 В", Номинал="6,8 к", Описание="Резистор чип 0603 6,8 кОм 0,1 Вт ±1 %", Отклонение="±1 %", Производитель=YAGEO, Температура окружающей среды (корпуса), макс#="+155 °C", Температура окружающей среды (корпуса), мин#="-55 °C", Температурный коэффициент сопротивления="200 ppm", Фамилия=Капустин
R10: library part r0257, "Резистор 0,063Вт", HelpURL=https://www.yageo.com/upload/media/product/products/datasheet/rchip/PYu-RC_Group_51_RoHS_L_10.pdf, ID=r0257, Корпус=0603, Наименование=RC0603FR-073K3L, Напряжение="75 В", Номинал="3,3 к", Описание="Резистор чип 0603 3,3 кОм 0,1 Вт ±1 %", Отклонение="±1 %", Производитель=YAGEO, Температура окружающей среды (корпуса), макс#="+155 °C", Температура окружающей среды (корпуса), мин#="-55 °C", Температурный коэффициент сопротивления="200 ppm", Фамилия=Капустин
R11: library part r0016, "Резистор 0,063Вт", ClassName=POWER, HelpURL=https://www.yageo.com/upload/media/product/products/datasheet/rchip/PYu-RC_Group_51_RoHS_L_10.pdf, ID=r0016, Корпус=0603, Наименование=RC0603FR-07100KL, Напряжение="75 В", Номинал="100 к", Описание="Резистор чип 0603 100 кОм 0,1 Вт ±1 %", Отклонение="±1 %", Производитель=YAGEO, Температура окружающей среды (корпуса), макс#="+155 °C", Температура окружающей среды (корпуса), мин#="-55 °C", Температурный коэффициент сопротивления="200 ppm", Фамилия=Капустин
VD1 VD3 VD4: library part vd0002, ClassName=POWER, HelpURL=https://www.vishay.com/docs/89054/mss2p3.pdf, ID=vd0002, Корпус=DO-219AD, Максимальное обратное напряжение="30 В", Максимальное прямое напряжение="0,6 В", Максимальный импульсный прямой ток="30 А", Максимальный обратный ток="250 мкА", Максимальный прямой ток="2 А", Наименование=MSS2P3, Описание="Диод Шоттки 30 В 2 А", Производитель=Vishay, Температура окружающей среды (корпуса), макс#="+150 °C", Температура окружающей среды (корпуса), мин#="-55 °C", Фамилия=Капустин
VD2: library part vd0010, HelpURL=https://www.vishay.com/docs/84830/plzseries.pdf, ID=vd0010, Корпус=DO-219AC, Максимальное обратное напряжение="15 В", Наименование=PLZ15C, Описание="Стабилитрон 15В", Производитель=Vishay, Температура окружающей среды (корпуса), макс#="150 °C", Температура окружающей среды (корпуса), мин#="-40 °C", Фамилия=Черемный
VT1: library part mos0001, ClassName=POWER, HelpURL=https://www.infineon.com/dgdl/irlml2502pbf.pdf?fileId=5546d462533600a401535668048e2606, ID=mos0001, Корпус=SOT23-3, Наименование=IRLML2502TRPBF, Напряжение затвор-исток="±12 В", Напряжение сток-исток="20 В", Описание="Транзистор полевой N-канальный 20 В 4,2 А", Производитель="International Rectifier", Сопротивление сток-исток="0,045 Ом", Температура окружающей среды (корпуса), макс#="+150 °C", Температура окружающей среды (корпуса), мин#="-55 °C", Ток стока="4,2 А", Фамилия=Капустин
VT2: library part mos0003, HelpURL=http://www.ti.com/lit/ds/symlink/csd19532q5b.pdf, ID=mos0003, Корпус="SON8P (5x6 мм)", Наименование=CSD19532Q5B, Напряжение затвор-исток="±20 В", Напряжение сток-исток="100 В", Описание="Транзистор полевой N-канальный 100 В 17 А", Производитель="Texas Instruments", Сопротивление сток-исток="0,0057 Ом", Температура окружающей среды (корпуса), макс#="+150 °C", Температура окружающей среды (корпуса), мин#="-55 °C", Ток стока="17 А", Фамилия=Капустин
X1 X10 X11: library part cn0076, HelpURL=http://www.connfly.com/userfiles/image/UpLoadFile/File/2015/1/29/DS1021.pdf, ID=cn0076, Альтернатива="не указана", Количество контактов=6, Контакт=отсутствует, Наименование=DS1021-2*3SF11, Напряжение="250 В", Описание="PLS 6-ти контактный прямой двухрядный (2,54 мм)", Ответная часть=DS1023-2*3S22, Производитель="Connfly Electronic Co. LTD", Семейство=PLS, Температура окружающей среды (корпуса), макс#="+105 °C", Температура окружающей среды (корпуса), мин#="-40 °C", Тип вывода=Прямой, Ток на контакт="3 А", Фамилия=Капустин, Цвет=Черный, Шаг="2,54 мм"
  X1: Contact_01=VIN, Contact_02=VIN, Contact_03=VIN, Contact_04=0V, Contact_05=0V, Contact_06=0V
  X10: Contact_01=VOUT, Contact_02=VOUT, Contact_03=VOUT, Contact_04=VOUT, Contact_05=VOUT, Contact_06=VOUT
  X11: Contact_01=GND, Contact_02=GND, Contact_03=GND, Contact_04=GND, Contact_05=GND, Contact_06=GND
X2 X3 X4 X5: library part fstn0012, ID=fstn0012, Диаметр отверстия=отсутствует, Наименование="Перемычка запаиваемая 3x1", Описание="Перемычка запаиваемая", Параметры металлизации="3x1 мм"

## Via types
v1: diameter 0.6, hole 0.3, Top Layer to Bottom Layer, tented both sides, 70 vias
v2: diameter 0.6, hole 0.3, Top Layer to Bottom Layer, 24 vias

## Nets (pads, with @x,y where several pads share a name; then routed paths per layer and width w, separated by ;. In a path a pad name is that pad's centre, name@x,y a point inside that pad or via, vN(x,y) a via of type N, cw(c..) or ccw(c..) an arc to the next point about the centre after c; other vN are vias at no path point)
0V_IN: R1.1 VD3.2 VT2.S X1.4 X1.5 X1.6 | length 23.1
  Top Layer w1: X1.4 X1.6 X1.5
  Signal Layer 1 w1: X1.4 X1.6 X1.5
  Bottom Layer w0.5: X1.6 76.17,74.17 76.9,74.9 VD3.2@76.9,76.5
  Bottom Layer w1: X1.4 X1.5 X1.6 X1.4
+VIN: C1.2 C2.2 C3.2 C4.2 DD1.2 DD1.3 DD1.4 R3.2 VD1.2 X1.1 X1.2 X1.3 | length 19.3
  Top Layer w0.15: v1@70.9,80.025 DD1.4@70.9,80.925
  Signal Layer 1 w0.15: 72.9,80.9 75.6,80.9 v1(75.925,81.225)
  Signal Layer 1 w1: X1.2 X1.1 X1.3
  Bottom Layer w0.15: v1(75.925,81.225) 75.925,80.625 76.275,80.275 R3.2
  Bottom Layer w0.7: C4.2 C3.2 ; C2.2 C1.2
  Bottom Layer w1: X1.2 X1.1 X1.3
  other v1: 66.5,76.75 67.25,76.75 70.85,76.75 66.5,77.5 67.25,77.5 70.85,77.5 66.5,78.25 67.25,78.25 70.85,78.25 66.5,79 67.25,79 70.85,79 66.5,79.75 67.25,79.75 70.85,79.75
+VOUT: C7.2 C8.2 C9.2 C10.2 L1.2 R2.2 R4.2 R11.2 X10.1 X10.2 X10.3 X10.4 X10.5 X10.6 | length 91.9
  Top Layer w0.15: v1(75.925,88.617) R11.2
  Top Layer w1: X10.3 X10.1 X10.2 X10.4 ; X10.3 X10.5 X10.6 X10.4 ; X10.3 X10.4
  Signal Layer 1 w1: X10.3 X10.1 X10.2 X10.4 ; X10.3 X10.5 X10.6 X10.4 ; X10.3 X10.4
  Signal Layer 2 w1: X10.3 X10.4 ; X10.3 X10.5 X10.6 X10.4 ; X10.3 X10.1 X10.2 X10.4
  Bottom Layer w0.15: X10.5@70.735,93.815 70.735,94.371 X10.5 71.975,93.375 75.675,93.375 ; v1(75.925,88.617) 76.8,89.492 76.8,93.375 ; R2.2 76.05,93 75.675,93.375 ; R4.2 77.55,93 77.175,93.375 76.8,93.375 ; 75.675,93.375 76.8,93.375
  Bottom Layer w1: C10.2 68.275,94.535 X10.3 ; X10.5@70.735,94.371 70.975,94.131 C7.2 ; X10.3 X10.5 X10.6 X10.4 ; X10.3 X10.1 X10.2 X10.4 ; X10.3 X10.4
  other v1: 69.75,86.5 70.45,86.5 71.15,86.5 71.85,86.5 69.4,87 70.1,87 70.8,87 71.5,87 72.2,87 69.75,87.5 70.45,87.5 71.15,87.5 71.85,87.5 69.4,88
BOOT: C5.1 DD1.1 | length 2.5
  Top Layer w0.15: v1(67.275,81.575) v1(67.95,80.9) DD1.1
  Bottom Layer w0.15: v1(67.275,81.575) 67.275,81.638 67.525,81.888 C5.1
FB: DD1.7 R7.1 R8.2 R9.1 R10.1 R11.1 | length 13.7
  Top Layer w0.15: DD1.7@70.9,84.875 70.934,84.909 70.934,85.434 71.117,85.617 76.017,85.617 R9.1 ; R7.1 R8.2 R9.1 ; R11.1 77.8,88.617 77.575,88.392 77.575,87.392 77.3,87.117 R10.1 R9.1
FB_3V3: R7.2 X2.2 | length 1.9
  Top Layer w0.15: R7.2 79.092,82.617 v1@79.146,82.671
  Bottom Layer w0.15: X2.2 v1(79.2,82.617)
FB_5V: R8.1 X3.2 | length 2
  Top Layer w0.15: R8.1 v1(79.2,84.117)
  Bottom Layer w0.15: X3.2 v1(79.2,84.117)
FB_12V: R9.2 X4.2 | length 2
  Top Layer w0.15: R9.2 v1(79.2,85.617)
  Bottom Layer w0.15: X4.2 v1(79.2,85.617)
FB_24V: R10.2 X5.2 | length 2
  Top Layer w0.15: R10.2 v1(79.2,87.117)
  Bottom Layer w0.15: X5.2 v1(79.2,87.117)
GND: C1.1 C2.1 C3.1 C4.1 C6.1 C7.1 C8.1 C9.1 C10.1 DD1.0 DD1.9 R6.2 VD4.1 VT1.2 VT2.D X2.1 X3.1 X4.1 X5.1 X11.1 X11.2 X11.3 X11.4 X11.5 X11.6 | length 81.5
  Top Layer w0.15: DD1.9@69.3,84.875 69.3,84.2 v2(69.6,83.9)
  Top Layer w1: X11.4 X11.3 ; X11.4 X11.2 X11.1 X11.3 ; X11.4 X11.6 X11.5 X11.3
  Signal Layer 1 w1: X11.4 X11.3 ; X11.4 X11.2 X11.1 X11.3 ; X11.4 X11.6 X11.5 X11.3
  Signal Layer 2 w1: X11.4 X11.6 X11.5 X11.3 ; X11.4 X11.2 X11.1 X11.3 ; X11.4 X11.3
  Bottom Layer w0.15: v1(75,81.6) 75,82.284 ; v1(75.025,85.034) v1@75.084,85.093 ; v1@75.075,85.034 75.075,86.859 75.333,87.117 X5.1 ; v1@75.134,85.093 75.134,85.418 75.333,85.617 X4.1 ; X2.1 75.333,82.617 75,82.284 ; X3.1 75.333,84.117 75,83.784 75,82.284
  Bottom Layer w1: X11.4 X11.2 X11.1 X11.3 ; X11.4 X11.3 ; X11.4 X11.6 X11.5 X11.3
  other v1: 65,81.5 65.75,81.5 73.6,81.6 74.3,81.6 65,82.25 65,83.75 73.625,85.034 74.325,85.034 73.375,86.5 74.075,86.5 74.775,86.5 73.025,87 73.725,87 74.425,87 73.375,87.5 74.075,87.5 74.775,87.5 73.025,88 73.725,88 74.425,88 73.375,88.5 74.075,88.5
  other v2: 74.85,76.65 75.7,76.65 74,77.5 74.85,77.5 75.7,77.5 74.85,78.4 75.7,78.4 74,79.25 74.85,79.25 75.7,79.25 74,80.1 74.85,80.1 69.6,81.9 70.6,81.9 69.1,82.4 70.1,82.4 71.1,82.4 69.6,82.9 70.6,82.9 69.1,83.4 70.1,83.4 71.1,83.4 70.6,83.9
NetHL1_1: HL1.1 R1.2 | length 3.5
  Top Layer w0.15: R1.2 66.975,71.65 v1(67.325,71.3)
  Bottom Layer w0.15: HL1.1 66.8,71.825 v1(67.325,71.3)
NetHL1_2: HL1.2 VD1.1 | length 2
  Bottom Layer w0.15: VD1.1 64.85,73.7 65.15,73.4 HL1.2
NetHL2_1: HL2.1 R2.1 | length 19.7
  Signal Layer 1 w0.15: v1(76.05,89.85) 77.075,88.825 77.075,75.25 v1(78.525,73.8)
  Bottom Layer w0.15: v1(76.05,89.85) R2.1 ; v1(78.525,73.8) 79.125,73.2 HL2.1
NetHL2_2: HL2.2 VT1.3 | length 20.9
  Top Layer w0.15: VT1.3 77.35,90.45 77.529,90.271 77.529,89.871 v1(77.55,89.85)
  Signal Layer 1 w0.15: v1(77.55,89.85) 77.55,76.025 v1@79.3,74.275
  Bottom Layer w0.15: HL2.2 77.475,73.8 77.975,74.3 v1(79.325,74.3)
NetR3_1: R3.1 VD2.2 VT2.G | length 4.6
  Top Layer w0.15: VT2.G v1(78.72,81.445)
  Bottom Layer w0.15: v1(78.72,81.445) 78.72,80.32 R3.1 78.675,79.5 79,79.175 VD2.2
NetR4_1: R4.1 R5.2 VT1.1 | length 5.3
  Top Layer w0.15: VT1.1 78.25,92.75 78.654,93.154 79.004,93.154 v1(79.05,93.2)
  Bottom Layer w0.15: R4.1 77.55,91.562 77.688,91.7 77.975,91.7 78.912,91.7 79.05,91.838 R5.2 v1(79.05,93.2) v1@79.05,93.4
NetVD2_1: VD2.1 VD3.1 | length 4
  Bottom Layer w0.15: VD3.1@76.9,78.4 77.175,78.4 77.725,78.4 78,78.125 78,77.688 78.487,77.2 78.8,77.2 79,77 VD2.1
PGOOD: DD1.8 R5.1 | length 17.1
  Top Layer w0.15: DD1.8@70.1,84.875 DD1.8 70.1,85.525 70.467,85.892 75.067,85.892 75.675,86.5 75.675,87.675 75.3,88.05 75.3,90.425 76.275,91.4 78.35,91.4 79.05,90.7 v1(79.05,89.85)
  Bottom Layer w0.15: v1(79.05,89.85) R5.1
RT: DD1.5 R6.1 | length 3.1
  Top Layer w0.15: DD1.5@71.787,81.012 71.7,80.925 71.7,81.175 72.5,81.975 72.5,82.475 72.825,82.8 R6.1@73.45,82.8
SS: C6.2 DD1.6 | length 2.1
  Top Layer w0.15: DD1.6@71.7,84.875 72.25,84.875 72.825,84.3 C6.2@73.525,84.3
SW: C5.2 DD1.10 L1.1 VD4.2 | length 0.9
  Bottom Layer w0.15: C5.2@67.525,83.775 C5.2 v1(67.525,84.675)

## Polygon pours and split planes (outlines as drawn)
GND on Top Layer "GND_L01_P028" (solid, remove dead copper, pour order 28): 64,100 64,92.325 72.5,92.325 72.5,86.2 74.933,86.2 75.3,86.567 75.3,90.425 76.55,91.675 80,91.675 80,100
0V_IN on Top Layer "0V_IN_L01_P016" (solid, remove dead copper, pour order 16): 80,79.225 77.625,79.225 77.625,76.25 77,75.625 64.014,75.625 64,70 80,70
GND on Top Layer "GND_L01_P020" (solid, remove dead copper, pour order 20): 76,85.5 76,82 75.25,81.25 73.25,81.25 73.25,85.5
GND on Top Layer "GND_L01_P018" (solid, remove dead copper, pour order 18): 64,84.2 71.6,84.2 71.6,81.6 67.25,81.6 65.9,80.25 65.9,75.875 64,75.875 64,81.6
+VOUT on Top Layer "+VOUT_L01_P008" (solid, remove dead copper, pour order 8): 68.875,86.2 68.875,92.13 72.5,92.13 72.5,86.2
+VIN on Top Layer "+VIN_L01_P002" (solid, remove dead copper, pour order 2): 69.075,81.5 69.075,80.225 68.95,80.1 66.15,80.1 66.15,75.875 71.8,75.875 71.8,80.1 70.45,80.1 70.325,80.225 70.325,81.5
SW on Top Layer "SW_L01_P000" (solid, remove dead copper, pour order 0): 67.75,84.375 68.675,84.375 68.675,92.13 64,92.13 64,84.375
0V_IN on Bottom Layer "0V_IN_L06_P026" (solid, remove dead copper, pour order 26): 80,77.625 76.275,77.625 76.275,75.7 64.014,75.7 64,70 80,70
GND on Bottom Layer "GND_L06_P012" (solid, remove dead copper, pour order 12): 67.15,92.775 66.625,93.3 64,93.3 64,75.875 66.125,75.875 66.125,80.9 71.75,80.9 71.75,75.7 76.075,75.7 76.075,79.5 75.325,80.25 75.325,92.875 76.075,93.625 80,93.625 80,100 75.45,100 72.725,100 72.725,87.574 72.725,86 69.075,86 67.15,87.925
+VOUT on Bottom Layer "+VOUT_L06_P010" (solid, remove dead copper, pour order 10): 71.9,92.85 72.5,92.25 72.5,86.2 69.1,86.2 67.35,87.95 67.35,92.85
+VIN on Bottom Layer "+VIN_L06_P006" (solid, remove dead copper, pour order 6): 66.15,80.875 71.725,80.875 71.725,71.025 67.75,71.025 67.75,73.375 66.15,73.375
GND on Signal Layer 1 "GND_L02_P022" (solid, remove dead copper, pour order 22): 64,70 64,100 80,100 80,70
+VIN on Signal Layer 1 "+VIN_L02_P014" (solid, remove dead copper, pour order 14): 67.532,73.593 66.15,74.975 66.15,81.475 72.925,81.475 72.925,75.3 71.975,75.3 ccw(c71.975,74.1) 70.775,74.1 70.775,73.62
GND on Signal Layer 2 "GND_L03_P024" (solid, remove dead copper, pour order 24): 64,70 64,100 80,100 80,70

## Silkscreen, mask and mechanical layers (free items; w line width, h text height)
Bottom Overlay:
  text "VOUT" at 65.645,99.675 h1.2 r180
  text "GND" at 73.3,99.675 h1.2 r180
  text "ERR" at 67.325,70.3 h1.2
  text "OK" at 79.7,70.3 h1.2
Bottom Solder:
  rectangle: 68.6,81.35 71.6,84.45
Board:
  lines w0.1: 63.625,100 79.625,100 ; 64,100 64,70 80,70 80,72 ; 80,100 80,72 ; 80,72 80,72
Assembly Notes:
  text "'.title'" at 64.3,67.8 h2
  text "'.project'_'.pcb_dec_number'['.Pcb_File_Name_No_Path']" at 64.3,65.3 h2